# Altium PCB arca.PcbDoc (part 1 of 2)
Units mm, origin at the board's own origin, x right, y up, seen from the top; angles counter-clockwise.
Board outline 304.8 x 85 mm, 2 copper layers (Top Layer, Bottom Layer); 193 components, 131 nets, 585 pads, 90 vias.
Unrouted connection lines stored in the file: 15.
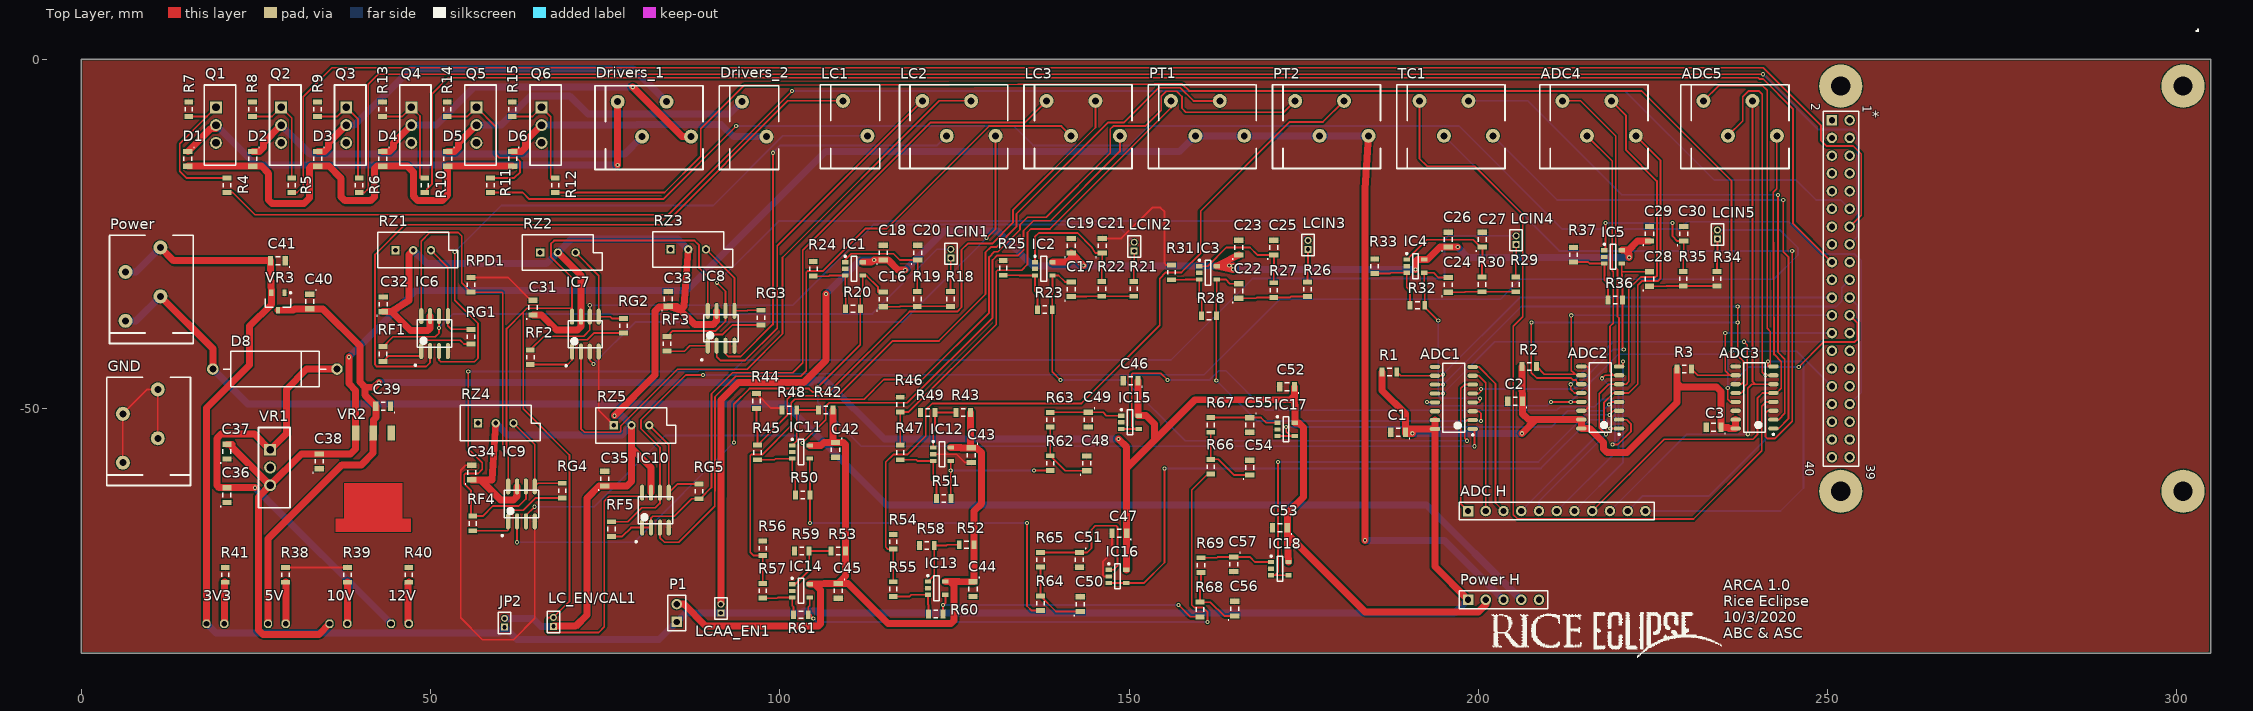
[diagram p0: Top Layer view]
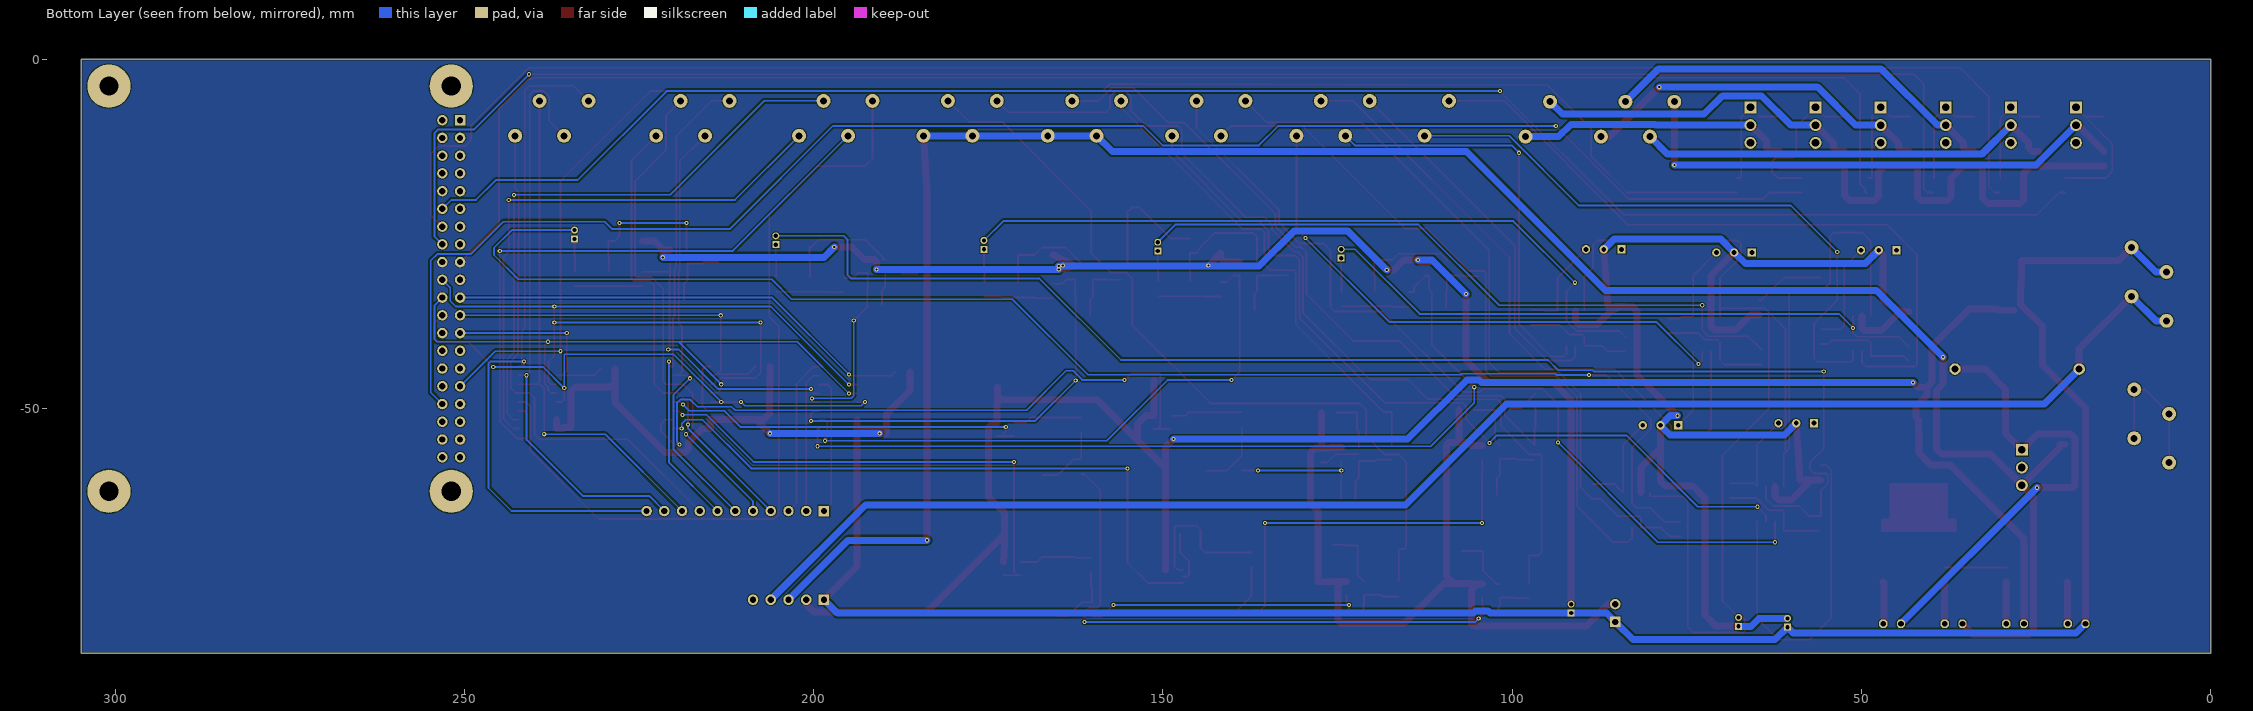
[diagram p1: Bottom Layer view, seen from below]

## Layer stack, top to bottom
Top Solder: solder mask 0.0102, Solder Resist, Dk 3.5
Top Layer: signal copper 0.0356
Dielectric 1: dielectric 0.32, FR-4, Dk 4.8
Bottom Layer: signal copper 0.0356
Bottom Solder: solder mask 0.0102, Solder Resist, Dk 3.5

## Board outline
0,-85 304.8,-85 304.8,0 0,0

## Design rules (kind name [scope] priority, off if disabled: settings)
BoardOutlineClearance [All] p1: gap=0.2 ignorepadtopadclearanceinfootprint=FALSE
Clearance [All] p1: gap=0.127 ignorepadtopadclearanceinfootprint=TRUE except(0.25: Arc-Hole Track-Hole SMDPad-Hole THPad-Hole Via-Hole Fill-Hole Poly-Hole Region-Hole Text-Hole; 0.254: Arc-Arc Arc-Track Arc-SMDPad Arc-THPad Arc-Via Arc-Fill Arc-Poly Arc-Region Arc-Text Track-Track Track-SMDPad Track-THPad Track-Via Track-Fill Track-Poly Track-Region Track-Text)
ComponentClearance [All] p1: gap=0.127 collisioncheckmode=3 verticalgap=0.127 showdistances=TRUE
DiffPairsRouting [All] p1: maxlimit=0.254 minlimit=0.127 mostfreqgap=0.127 toplayer_minwidth=0.127 toplayer_maxwidth=25.4 toplayer_prefwidth=0.127 bottomlayer_minwidth=0.127 bottomlayer_maxwidth=25.4 bottomlayer_prefwidth=0.127 maxuncoupledlength=12.7
Height [All] p1: minheight=0 maxheight=1816.048 prefheight=12.7
HoleSize [All] p1: absolutevalues=TRUE maxlimit=6.3 minlimit=0.3 maxpercent=80.000 minpercent=20.000
HoleToHoleClearance [All] p1: gap=0.25 allowstackedmicrovias=FALSE
MinimumAnnularRing [All] p1: minimumring=0.076
MinimumSolderMaskSliver [All] p1: minsoldermaskwidth=0
PlaneClearance [All] p1: clearance=0.127
PlaneConnect PlaneConnectPowerPads [InPadClass('PowerPads')] p1: planeconnectstyle=Direct reliefexpansion=0.508 reliefentries=4 reliefconductorwidth=0.254 reliefairgap=0.254
PlaneConnect [All] p2: pad.planeconnectstyle=Relief pad.reliefexpansion=0.3 pad.reliefentries=4 pad.reliefconductorwidth=0.127 pad.reliefairgap=0.127 via.planeconnectstyle=Direct via.reliefexpansion=0.3 via.reliefentries=4 via.reliefconductorwidth=0.127 via.reliefairgap=0.127
PolygonConnect PolygonConnectPowerPads [All vs (InPadClass('PowerPads'))] p1: connectstyle=Direct reliefconductorwidth=0.254 reliefentries=4 polygonreliefangle="90 Angle" airgapwidth=0.254
PolygonConnect [All] p2: thpad.connectstyle=Relief thpad.reliefconductorwidth=0.127 thpad.reliefentries=4 thpad.polygonreliefangle="90 Angle" thpad.airgapwidth=0.127 smdpad.connectstyle=Relief smdpad.reliefconductorwidth=0.127 smdpad.reliefentries=4 smdpad.polygonreliefangle="90 Angle" smdpad.airgapwidth=0.127 via.connectstyle=Direct via.reliefconductorwidth=0.127 via.reliefentries=4 via.polygonreliefangle="90 Angle" via.airgapwidth=0.127
RoutingVias [All] p1: holewidth=0.3 width=0.6 viastyle="Through Hole" minholewidth=0.3 minwidth=0.6 maxholewidth=0.6 maxwidth=6.6
SilkToSilkClearance [All] p1: silktosilkclearance=0
SilkToSolderMaskClearance [IsPad] p1: minsilkscreentomaskgap=0.127 clearancetoexposedcopper=TRUE
SolderMaskExpansion [All] p1: expansion=0.075 istentingtop=FALSE
Width Width_1 [InNetClass('PWR') OR InNetClass('GND')] p1: maxlimit=1.5 minlimit=0.5 preferedwidth=1 minimp=50.000000 maximp=50.000000 favimp=50.000000
Width [InNetClass('PWR')] p2: maxlimit=25.4 minlimit=0.127 preferedwidth=0.254 minimp=50.000000 maximp=50.000000 favimp=50.000000
20 further rules are at their usual default settings.

## Classes and differential pairs
net class PWR: +3V3 +3V3_LC +3V3_LCAA +3V3_PT +5V +10V +12 +12V DRIVER_1_NEGATIVE DRIVER_2_NEGATIVE DRIVER_3_NEGATIVE DRIVER_4_NEGATIVE DRIVER_5_NEGATIVE DRIVER_6_NEGATIVE Net3V3_K Net5V_K Net10V_K Net12V_A Net12V_K
component class PT_to_ADCs: C46 C47 C48 C49 C50 C51 C52 C53 C54 C55 C56 C57 IC15 IC16 IC17 IC18 R62 R63 R64 R65 R66 R67 R68 R69
component class Pressure_Transducers_SCH: C42 C43 C44 C45 IC11 IC12 IC13 IC14 P1 R42 R43 R44 R45 R46 R47 R48 R49 R50 R51 R52 R53 R54 R55 R56 R57 R58 R59 R60 R61
component class Power: 3V3 5V 10V 12V C36 C37 C38 C39 C40 C41 D8 PWR_IN1 R38 R39 R40 R41 VR1 VR3
component class PI_SCH: *
component class Load_Cells_SCH: C31 C32 C33 C34 C35 IC6 IC7 IC8 IC9 IC10 JP2 LC_EN/CAL1 RF1 RF2 RF3 RF4 RF5 RG1 RG2 RG3 RG4 RG5 RPD1 RZ1 RZ2 RZ3 RZ4 RZ5 RZ6
component class LC_to_ADC: C16 C17 C18 C19 C20 C21 C22 C23 C24 C25 C26 C27 C28 C29 C30 IC1 IC2 IC3 IC4 IC5 LCAA_EN1 LCIN1 LCIN2 LCIN3 LCIN4 LCIN5 R18 R19 R20 R21 R22 R23 R24 R25 R26 R27 R28 R29 R30 R31 R32 R33 R34 R35 R36 R37
component class drivers_SCH: D1 D2 D3 D4 D5 D6 Q1 Q2 Q3 Q4 Q5 Q6 R4 R5 R6 R7 R8 R9 R10 R11 R12 R13 R14 R15
component class Connectors: ADC4 ADC5 "ADC H" Drivers_1 Drivers_2 GND LC1 LC2 LC3 Power "Power H" PT1 PT2 TC1
component class ADC_SCH: ADC1 ADC2 ADC3 C1 C2 C3 R1 R2 R3

## Components (designator, comment, footprint, x,y, rotation, side; value= is the part's Value field where it differs from the comment)
3V3 "LED5MM" LED5MM 19.177,-80.772 r0 top
5V "LED5MM" LED5MM 27.982,-80.772 r0 top
10V "LED5MM" LED5MM 36.788,-80.772 r0 top
12V "LED5MM" LED5MM 45.593,-80.772 r0 top
* "raspberry_pi" HDR2X20 250.596,-8.687 r270 top
ADC1 "MCP3208" SOIC127P600X175-16N 196.469,-48.45 r180 top
ADC2 "MCP3208" SOIC127P600X175-16N 217.424,-48.387 r180 top
ADC3 "MCP3208" SOIC127P600X175-16N 239.522,-48.387 r180 top
ADC4 "PTSA 1,5/ 4-3,5-Z - 1985218" 4PinCanConnector 212.019,-5.922 r90 top
ADC5 "PTSA 1,5/ 4-3,5-Z - 1985218" 4PinCanConnector 232.212,-5.922 r90 top
"ADC H" "Header 11" HDR1X11 198.501,-64.643 r0 top
C1 "Cap" CAPCP2012X06N 188.493,-53.391 r180 top value=1uF
C2 "Cap" CAPCP2012X06N 205.249,-48.946 r180 top value=1uF
C3 "Cap" CAPCP2012X06N 233.655,-52.68 r180 top value=1uF
C16 "1nF" CAPCP2012X06N 114.774,-34.34 r90 top
C17 "1nF" CAPCP2012X06N 141.698,-32.893 r90 top
C18 "0.1UF" CAPCP2012X06N 114.774,-27.652 r90 top
C19 "0.1UF" CAPCP2012X06N 141.698,-26.67 r90 top
C20 "1nF" CAPCP2012X06N 119.727,-27.652 r90 top
C21 "1nF" CAPCP2012X06N 146.143,-26.67 r90 top
C22 "1nF" CAPCP2012X06N 165.701,-33.147 r90 top
C23 "0.1UF" CAPCP2012X06N 165.701,-26.924 r90 top
C24 "1nF" CAPCP2012X06N 195.673,-32.258 r90 top
C25 "1nF" CAPCP2012X06N 170.716,-26.924 r90 top
C26 "0.1UF" CAPCP2012X06N 195.673,-25.781 r90 top
C27 "1nF" CAPCP2012X06N 200.561,-25.781 r90 top
C28 "1nF" CAPCP2012X06N 224.482,-31.43 r90 top
C29 "0.1UF" CAPCP2012X06N 224.482,-24.953 r90 top
C30 "1nF" CAPCP2012X06N 229.37,-24.953 r90 top
C31 "1UF" CAPCP2012X06N 64.643,-35.513 r90 top
C32 "1UF" CAPCP2012X06N 43.18,-35.052 r90 top
C33 "1UF" CAPCP2012X06N 83.978,-34.278 r90 top
C34 "1UF" CAPCP2012X06N 55.849,-59.127 r90 top
C35 "1UF" CAPCP2012X06N 74.93,-60.016 r90 top
C36 "Cap" CAPCP2012X06N 20.828,-62.357 r90 top value=.33uF
C37 "Cap" CAPCP2012X06N 20.828,-56.134 r90 top value=.1uF
C38 "Cap" CAPCP2012X06N 34.036,-57.531 r90 top value=10uF
C39 "Cap" CAPCP2012X06N 43.18,-49.657 r180 top value=10uF
C40 "Cap" CAPCP2012X06N 32.7,-34.651 r270 top value=1uF
C41 "Cap" CAPCP2012X06N 28.128,-28.809 r180 top value=2.2uF
C42 "0.1UF" CAPCP2012X06N 107.95,-55.88 r270 top
C43 "0.1UF" CAPCP2012X06N 127.381,-56.642 r270 top
C44 "0.1UF" CAPCP2012X06N 127.635,-75.819 r270 top
C45 "0.1UF" CAPCP2012X06N 108.331,-76.073 r270 top
C46 "0.1UF" CAPCP2012X06N 150.207,-45.974 r180 top
C47 "0.1UF" CAPCP2012X06N 148.59,-67.818 r180 top
C48 "68nF" CAPCP2012X06N 143.891,-57.819 r90 top
C49 "680pF" CAPCP2012X06N 144.145,-51.562 r270 top
C50 "68nF" CAPCP2012X06N 143.002,-77.978 r90 top
C51 "680pF" CAPCP2012X06N 142.875,-71.628 r270 top
C52 "0.1UF" CAPCP2012X06N 172.593,-46.863 r180 top
C53 "0.1UF" CAPCP2012X06N 171.577,-67.056 r180 top
C54 "68nF" CAPCP2012X06N 167.259,-58.42 r90 top
C55 "680pF" CAPCP2012X06N 167.259,-52.324 r270 top
C56 "68nF" CAPCP2012X06N 165.1,-78.613 r90 top
C57 "680pF" CAPCP2012X06N 164.973,-72.263 r270 top
D1 "Diode" DIOC2012X06N 15.24,-14.224 r270 top
D2 "Diode" DIOC2012X06N 24.536,-14.224 r270 top
D3 "Diode" DIOC2012X06N 33.833,-14.224 r270 top
D4 "Diode" DIOC2012X06N 43.129,-14.224 r270 top
D5 "Diode" DIOC2012X06N 52.426,-14.224 r270 top
D6 "Diode" DIOC2012X06N 61.722,-14.224 r270 top
D8 "Diode" DIODE-0.7 27.686,-44.323 r0 top
Drivers_1 "1991118" 4PinCanConnector 76.764,-6.049 r90 top
Drivers_2 "0" 2POS_GREEN_BOI 91.334,-3.763 r90 top
GND "1991118" 4PinCanConnector 5.922,-57.729 r180 top
IC1 "LMV321LICTRT" SOT95P245X110-5N 110.583,-29.972 r0 top
IC2 "LMV321LICTRT" SOT95P245X110-5N 137.761,-29.972 r0 top
IC3 "LMV321LICTRT" SOT95P245X110-5N 161.276,-30.541 r0 top
IC4 "LMV321LICTRT" SOT95P245X110-5N 190.974,-29.591 r0 top
IC5 "LMV321LICTRT" SOT95P245X110-5N 219.275,-28.255 r0 top
IC6 "MCP6N11R" SOIC127P1030X265-8N 50.546,-39.243 r90 top
IC7 "MCP6N11R" SOIC127P1030X265-8N 72.136,-39.323 r90 top
IC8 "MCP6N11R" SOIC127P1030X265-8N 91.567,-38.481 r90 top
IC9 "MCP6N11R" SOIC127P1030X265-8N 62.992,-63.627 r90 top
IC10 "MCP6N11R" SOIC127P1030X265-8N 82.169,-64.516 r90 top
IC11 "LMV321LICTRT" SOT95P245X110-5N 103.017,-56.195 r0 top
IC12 "LMV321LICTRT" SOT95P245X110-5N 123.19,-56.515 r0 top
IC13 "LMV321LICTRT" SOT95P245X110-5N 122.428,-75.692 r0 top
IC14 "LMV321LICTRT" SOT95P245X110-5N 102.997,-76.073 r0 top
IC15 "LMV321LICTRT" SOT95P245X110-5N 150.114,-51.943 r0 top
IC16 "LMV321LICTRT" SOT95P245X110-5N 148.336,-74.007 r0 top
IC17 "LMV321LICTRT" SOT95P245X110-5N 172.466,-52.959 r0 top
IC18 "LMV321LICTRT" SOT95P245X110-5N 171.557,-72.898 r0 top
JP2 "PINHD-1X2" MHDR1X2 60.579,-81.28 r90 top
LC1 "0" 2POS_GREEN_BOI 105.796,-3.636 r90 top
LC2 "1991118" 4PinCanConnector 120.373,-5.922 r90 top
LC3 "1991118" 4PinCanConnector 138.169,-5.922 r90 top
LC_EN/CAL1 "PINHD-1X2" MHDR1X2 67.564,-81.153 r90 top
LCAA_EN1 "PINHD-1X2" MHDR1X2 91.533,-79.248 r90 top
LCIN1 "PINHD-1X2" MHDR1X2 124.46,-28.448 r90 top
LCIN2 "PINHD-1X2" MHDR1X2 150.715,-27.432 r90 top
LCIN3 "PINHD-1X2" MHDR1X2 175.607,-27.178 r90 top
LCIN4 "PINHD-1X2" MHDR1X2 205.4,-26.518 r90 top
LCIN5 "PINHD-1X2" MHDR1X2 234.209,-25.69 r90 top
P1 "Header 2" HDR1X2 85.217,-80.518 r90 top
Power "1991118" 4PinCanConnector 6.303,-37.409 r180 top
"Power H" "Header 5" HDR1X5 198.501,-77.343 r0 top
PT1 "1991118" 4PinCanConnector 155.965,-5.922 r90 top
PT2 "1991118" 4PinCanConnector 173.761,-5.922 r90 top
Q1 "FQP30N06L-ND" UA78M 22.098,-9.525 r90 top
Q2 "FQP30N06L-ND" UA78M 31.42,-9.525 r90 top
Q3 "FQP30N06L-ND" UA78M 40.742,-9.525 r90 top
Q4 "FQP30N06L-ND" UA78M 50.063,-9.525 r90 top
Q5 "FQP30N06L-ND" UA78M 59.385,-9.525 r90 top
Q6 "FQP30N06L-ND" UA78M 68.707,-9.525 r90 top
R1 "Res1" RESC_0805_2012 187.249,-44.729 r180 top
R2 "Res1" RESC_0805_2012 207.264,-43.942 r180 top
R3 "Res1" RESC_0805_2012 229.464,-44.323 r180 top
R4 "Res1" RESC_0805_2012 20.828,-18 r90 top value=10K
R5 "Res1" RESC_0805_2012 30.099,-18 r90 top value=10K
R6 "Res1" RESC_0805_2012 39.751,-18 r90 top value=10K
R7 "Res1" RESC_0805_2012 15.367,-7.112 r270 top value=270K
R8 "Res1" RESC_0805_2012 24.486,-7.112 r270 top value=270K
R9 "Res1" RESC_0805_2012 33.783,-7.112 r270 top value=270K
R10 "Res1" RESC_0805_2012 49.149,-18 r90 top value=10K
R11 "Res1" RESC_0805_2012 58.547,-18 r90 top value=10K
R12 "Res1" RESC_0805_2012 67.818,-18 r90 top value=10K
R13 "Res1" RESC_0805_2012 43.079,-7.112 r270 top value=270K
R14 "Res1" RESC_0805_2012 52.376,-7.112 r270 top value=270K
R15 "Res1" RESC_0805_2012 61.672,-7.112 r270 top value=270K
R18 "24.7K" RESC_0805_2012 124.426,-34.29 r90 top
R19 "164K" RESC_0805_2012 119.665,-34.29 r270 top
R20 "50.6K" RESC_0805_2012 110.456,-35.687 r180 top
R21 "24.7K" RESC_0805_2012 150.64,-32.843 r90 top
R22 "164K" RESC_0805_2012 146.081,-32.843 r270 top
R23 "50.6K" RESC_0805_2012 137.922,-35.814 r180 top
R24 "12.6K" RESC_0805_2012 104.775,-29.972 r90 top
R25 "12.6K" RESC_0805_2012 131.953,-29.845 r90 top
R26 "24.7K" RESC_0805_2012 175.514,-32.893 r90 top
R27 "164K" RESC_0805_2012 170.688,-33.02 r270 top
R28 "50.6K" RESC_0805_2012 161.417,-36.703 r180 top
R29 "24.7K" RESC_0805_2012 205.325,-32.208 r90 top
R30 "164K" RESC_0805_2012 200.499,-32.208 r270 top
R31 "12.6K" RESC_0805_2012 156.049,-30.48 r90 top
R32 "50.6K" RESC_0805_2012 191.262,-35.179 r180 top
R33 "12.6K" RESC_0805_2012 185.132,-29.591 r90 top
R34 "24.7K" RESC_0805_2012 234.134,-31.38 r90 top
R35 "164K" RESC_0805_2012 229.308,-31.38 r270 top
R36 "50.6K" RESC_0805_2012 219.583,-34.417 r180 top
R37 "12.6K" RESC_0805_2012 213.614,-27.94 r90 top
R38 "140" RESC_0805_2012 29.21,-73.787 r90 top
R39 "470" RESC_0805_2012 38.1,-73.787 r270 top
R40 "530" RESC_0805_2012 46.863,-73.787 r270 top
R41 "39" RESC_0805_2012 20.574,-73.787 r90 top
R42 "20K" RESC_0805_2012 106.553,-50.165 r180 top
R43 "20K" RESC_0805_2012 126.238,-50.546 r180 top
R44 "22" RESC_0805_2012 96.647,-48.895 r270 top
R45 "20K" RESC_0805_2012 96.774,-56.261 r90 top
R46 "22" RESC_0805_2012 117.221,-49.403 r270 top
R47 "20K" RESC_0805_2012 117.221,-56.261 r90 top
R48 "3K" RESC_0805_2012 101.346,-50.165 r180 top
R49 "3K" RESC_0805_2012 121.158,-50.546 r180 top
R50 "150K" RESC_0805_2012 103.251,-62.357 r180 top
R51 "150K" RESC_0805_2012 123.444,-62.865 r180 top
R52 "20K" RESC_0805_2012 126.712,-69.469 r180 top
R53 "20K" RESC_0805_2012 108.331,-70.358 r180 top
R54 "22" RESC_0805_2012 116.205,-69.054 r270 top
R55 "20K" RESC_0805_2012 116.205,-75.819 r90 top
R56 "22" RESC_0805_2012 97.536,-69.977 r270 top
R57 "20K" RESC_0805_2012 97.536,-76.073 r90 top
R58 "3K" RESC_0805_2012 121.031,-69.596 r180 top
R59 "3K" RESC_0805_2012 103.124,-70.358 r180 top
R60 "150K" RESC_0805_2012 122.301,-79.375 r180 top
R61 "150K" RESC_0805_2012 102.997,-79.502 r180 top
R62 "1.5K" RESC_0805_2012 138.684,-57.785 r270 top
R63 "150K" RESC_0805_2012 138.684,-51.562 r270 top
R64 "1.5K" RESC_0805_2012 137.287,-77.851 r270 top
R65 "150K" RESC_0805_2012 137.287,-71.628 r270 top
R66 "1.5K" RESC_0805_2012 161.671,-58.293 r270 top
R67 "150K" RESC_0805_2012 161.671,-52.324 r270 top
R68 "1.5K" RESC_0805_2012 160.147,-78.74 r270 top
R69 "150K" RESC_0805_2012 160.274,-72.39 r270 top
RF1 "20K" RESC_0805_2012 43.18,-42.164 r270 top
RF2 "20K" RESC_0805_2012 64.262,-42.625 r270 top
RF3 "20K" RESC_0805_2012 83.82,-40.706 r270 top
RF4 "20K" RESC_0805_2012 56.007,-66.421 r270 top
RF5 "20K" RESC_0805_2012 75.877,-67.23 r270 top
RG1 "200" RESC_0805_2012 55.753,-39.685 r270 top
RG2 "200" RESC_0805_2012 77.597,-38.119 r270 top
RG3 "200" RESC_0805_2012 97.282,-36.957 r270 top
RG4 "200" RESC_0805_2012 68.834,-61.722 r270 top
RG5 "200" RESC_0805_2012 88.392,-61.835 r270 top
RPD1 "20K" RESC_0805_2012 55.753,-32.258 r90 top
RZ1 "RPot" VR5 47.498,-27.305 r0 top value=1K
RZ2 "RPot" VR5 68.199,-27.639 r0 top value=1K
RZ3 "RPot" VR5 86.868,-27.178 r0 top value=1K
RZ4 "RPot" VR5 59.309,-52.07 r0 top value=1K
RZ5 "RPot" VR5 78.74,-52.371 r0 top value=1K
TC1 "1991118" 4PinCanConnector 191.557,-5.922 r90 top
VR1 "UA78M" UA78M 29.845,-58.547 r90 top
VR2 "LM1084ISX-5.0/NOPB" LM1084ISX-5.0/NOPB 41.783,-53.467 r90 top
VR3 "AP2210N-3.3TRG1" SOT95P245X110-3N 28.128,-34.651 r270 top

## Footprints (in the part's own frame and the unit in brackets; to place one, negate y for a bottom-side part, rotate by r counter-clockwise, add the part's x,y. Pads: shape width x height; smd on the part's side, far side on the other; paste and mask are expansions set on the pad)
2POS_GREEN_BOI [mm]
  round 2 hole 1: 1(-2.286,-3.226) 2(-7.286,-6.726)
  silkscreen extent -11.99,-8.5 0.01,0.02
4PinCanConnector [mm]
  round 2 hole 1: 1(0,0) 2(-5,-3.5) 3(0,-7) 4(-5,-10.5)
  silkscreen extent -9.7,-12.23 2.3,3.25, body extent -9.65,-12.32 2.35,3.18, height 13.6
CAPCP2012X06N [mm] "Chip Capacitor, 2-Leads, Body 2.00x1.20mm, IPC Medium Density"
  rect 0.75x1.35 smd: 1(-1.05,0) 2(1.05,0)
  silkscreen extent -1.69,-0.58 0.3,0.94, body extent -1,-0.6 1,0.6, height 0.6
DIOC2012X06N [mm] "Chip Diode, 2-Leads, Body 2.00x1.20mm, IPC Medium Density"
  rect 0.75x1.35 smd: 1(-1.05,0) 2(1.05,0)
  silkscreen extent -1.69,-0.58 0.3,0.94, body extent -1,-0.6 1,0.6, height 0.6
DIODE-0.7 [mm] "Diode, Thru-Hole; 2 Leads; 0.7 in Pin Spacing"
  round 1.65 hole 1: 1(-8.89,0) 2(8.89,0)
  silkscreen extent -7.37,-2.54 7.37,2.54
HDR1X2 [mm] "Connector; Header; 2 Position"
  rect 1.5x1.5 hole 0.9: 1(0,0)
  round 1.5 hole 0.9: 2(2.54,0)
  silkscreen extent -1.27,-1.27 3.81,1.27
HDR1X5 [mm] "Connector; Header; 5 Position"
  rect 1.5x1.5 hole 0.9: 1(0,0)
  round 1.5 hole 0.9: 2(2.54,0) 3(5.08,0) 4(7.62,0) 5(10.16,0)
  silkscreen extent -1.27,-1.27 11.43,1.27
HDR1X11 [mm] "Connector; Header; 11 Position"
  rect 1.5x1.5 hole 0.9: 1(0,0)
  round 1.5 hole 0.9: 2(2.54,0) 3(5.08,0) 4(7.62,0) 5(10.16,0) 6(12.7,0) 7(15.24,0) 8(17.78,0) 9(20.32,0) 10(22.86,0) 11(25.4,0)
  silkscreen extent -1.27,-1.27 26.67,1.27
HDR2X20 [mm] "Connector; Header; 20x2 Position"
  round 1.5 hole 0.9: 1(0,2.54) 3(2.54,2.54) 4(2.54,0) 5(5.08,2.54) 6(5.08,0) 7(7.62,2.54) 8(7.62,0) 9(10.16,2.54) 10(10.16,0) 11(12.7,2.54) 12(12.7,0) 13(15.24,2.54) 14(15.24,0) 15(17.78,2.54) 16(17.78,0) 17(20.32,2.54) 18(20.32,0) 19(22.86,2.54) 20(22.86,0) 21(25.4,2.54) 22(25.4,0) 23(27.94,2.54) 24(27.94,0) 25(30.48,2.54) 26(30.48,0) 27(33.02,2.54) 28(33.02,0) 29(35.56,2.54) 30(35.56,0) 31(38.1,2.54) 32(38.1,0) 33(40.64,2.54) 34(40.64,0) 35(43.18,2.54) 36(43.18,0) 37(45.72,2.54) 38(45.72,0) 39(48.26,2.54) 40(48.26,0)
  rect 1.5x1.5 hole 0.9: 2(0,0)
  silkscreen extent -1.27,-1.27 49.53,3.81
LED5MM [mil]
  oct 46.48x46.48 / inner oct 60x60 / far side oct 46.48x46.48 hole 32: A(-50,0) K(50,0)
LM1084ISX-5.0/NOPB [mil]
  rect 85x42 smd: 1(0,-100) 2(0,0) 3(0,100)
  Top Layer region: -558,-164 -283,-164 -283,164 -558,164
  Top Layer region: -558,-212.5 -483,-212.5 -483,212.5 -558,212.5
MHDR1X2 [mm] "Connector; Header; 2 Position"
  rect 1x1 hole 0.6: 1(0,0)
  round 1 hole 0.6: 2(1.27,0)
  silkscreen extent -0.9,-0.9 2.17,0.9
RESC_0805_2012 [mm] "Chip Resistor, 2-Leads, Body 2.00x1.20mm, IPC Medium Density"
  rect 0.7x1.25 smd: 1(-1.05,0) 2(1.05,0)
  silkscreen extent -0.3,-0.53 0.3,0.53, body extent -1,-0.6 1,0.6, height 0.6
SOIC127P600X175-16N [mm] "SOIC, 16-Leads, Body 9.90x3.90mm, Pitch 1.27mm, IPC Medium Density"
  oval 1.5x0.6 smd: 1(-2.7,4.445) 2(-2.7,3.175) 3(-2.7,1.905) 4(-2.7,0.635) 5(-2.7,-0.635) 6(-2.7,-1.905) 7(-2.7,-3.175) 8(-2.7,-4.445) 9(2.7,-4.445) 10(2.7,-3.175) 11(2.7,-1.905) 12(2.7,-0.635) 13(2.7,0.635) 14(2.7,1.905) 15(2.7,3.175) 16(2.7,4.445)
  silkscreen extent -2.83,-4.95 1.55,5.42, body extent -1.95,-4.95 1.95,4.95, height 1.75
SOIC127P1030X265-8N [mm] "SOIC, 8-Leads, Body 4.90x3.90mm, Pitch 1.27mm, IPC Medium Density"
  oval 2.3x0.6 smd: 1(-2.5,1.905) 2(-2.5,0.635) 3(-2.5,-0.635) 4(-2.5,-1.905) 5(2.5,-1.905) 6(2.5,-0.635) 7(2.5,0.635) 8(2.5,1.905)
  silkscreen extent -4.65,-2.45 1.95,2.88, body extent -1.95,-2.45 1.95,2.45, height 2.65
SOT95P245X110-3N [mm] "SOT23, 3-Leads, Body 3.60x2.45mm, Pitch 0.95mm, IPC Medium Density"
  rect 0.9x0.6 smd: 1(-1.25,0.95) 2(-1.25,-0.95) 3(1.25,0)
  silkscreen extent -1.37,-1.8 0.8,1.93, body extent -0.8,-1.8 0.8,1.8, height 1.1
SOT95P245X110-5N [mm] "SOT23, 5-Leads, Body 3.60x2.45mm, Pitch 0.95mm, IPC Medium Density"
  rect 0.9x0.6 smd: 1(-1.25,0.95) 2(-1.25,0) 3(-1.25,-0.95) 4(1.25,-0.95) 5(1.25,0.95)
  silkscreen extent -1.37,-1.8 0.4,1.92, body extent -0.8,-1.8 0.8,1.8, height 1.1
UA78M [mm] "TO220"
  rect 1.7x1.7 hole 1.1: 1(2.667,2.84)
  round 1.7 hole 1.1: 2(0.127,2.84) 3(-2.413,2.84)
  silkscreen extent -5.62,0.01 5.88,4.51
VR5 [mm] "Thru-Hole; 3 Leads"
  rect 1.2x1.2 hole 0.7: 1(-2.54,0)
  round 1.2 hole 0.7: 2(0,0) 3(2.54,0)
  silkscreen extent -5.08,-2.54 6.35,2.54

## Part data
3V3 5V 10V 12V: "LEDOSRAM:- CHIPLEDLG R971, LG N971, LY N971, LG Q971, LY Q971, LO R971, LY R971 LH N974, LH R974LS Q976, LO Q976, LY Q976LO Q996- Hyper CHIPLEDLW Q18SLB Q993, LB Q99A, LB R99A- SideLEDLS A670, LO A670, LY A670, LG A670, LP A670LB A673, LV A673, LT A673, LW A673LH A674LY A675LS A676, LA A676, LO A676, LY A676, LW A676LS A679, LY A679, LG A679-  Hyper Micro SIDELEDÂ®LS Y876, LA Y876, LO Y876, LY Y876LT Y87S- SmartLEDLW L88C, LW L88SLB L89C, LB L89S, LG L890LS L89K, LO L89K, LY L89KLS L896, LA L896, LO L896, LY L896- TOPLEDLS T670, LO T670, LY T670, LG T670, LP T670LSG T670, LSP T670, LSY T670, LOP T670, LYG T670LG T671, LOG T671, LSG T671LB T673, LV T673, LT T673, LW T673LH T674LS T676, LA T676, LO T676, LY T676, LB T676, LH T676, LSB T676, LW T676LB T67C, LV T67C, LT T67C, LS T67K, LO T67K, LY T67K, LW E67CLS E67B, LA E67B, LO E67B, LY E67B, LB E67C, LV E67C, LT E67CLW T67CLS T679, LY T679, LG T679LS T770, LO T770, LY T770, LG T770, LP T770LB T773, LV T773, LT T773, LW T773LH T774LS E675, LA E675, LY E675, LS T675LS T776, LA T776, LO T776, LY T776, LB T776LHGB T686LT T68C, LB T68C- Hyper Mini TOPLEDÂ®LB M676- Mini TOPLED SantanaÂ®LG M470LS M47K, LO M47K, LY M47K Source: http://www.osram.convergy.deLUXEON:- LUMILEDÂ®LXK2-PW12-R00, LXK2-PW12-S00, LXK2-PW14-U00, LXK2-PW14-V00LXK2-PM12-R00, LXK2-PM12-S00, LXK2-PM14-U00LXK2-PE12-Q00, LXK2-PE12-R00, LXK2-PE12-S00, LXK2-PE14-T00, LXK2-PE14-U00LXK2-PB12-K00, LXK2-PB12-L00, LXK2-PB12-M00, LXK2-PB14-N00, LXK2-PB14-P00, LXK2-PB14-Q00LXK2-PR12-L00, LXK2-PR12-M00, LXK2-PR14-Q00, LXK2-PR14-R00LXK2-PD12-Q00, LXK2-PD12-R00, LXK2-PD12-S00LXK2-PH12-R00, LXK2-PH12-S00LXK2-PL12-P00, LXK2-PL12-Q00, LXK2-PL12-R00 Source: www.luxeon.comKINGBRIGHT:KA-3528ASYCSource: www.kingbright.com", DeviceName=5MM, DeviceSetName=LED, GateName_1=G$1, LibraryName=led, SymbolName_1=LED
ADC4 ADC5: "Phoenix Contact PCB Terminal Spring Cage Clamp + Button 4 pos"
"ADC H": "Header, 11-Pin", LatestRevisionDate=17-Jul-2002, LatestRevisionNote="Re-released for DXP Platform.", Publisher="Altium Limited"
C1 C2 C3 C36 C37 C38 C39 C40 C41: "Capacitor", LatestRevisionDate=17-Jul-2002, LatestRevisionNote="Re-released for DXP Platform.", PackageDescription="Radial Cap, Thru-Hole; 2 Leads; 0.3 in Pin Spacing", PackageReference=RAD-0.3, Published=8-Jun-2000, Publisher="Altium Limited"
C16 C17 C18 C19 C20 C21 C22 C23 C24 C25 C26 C27 C28 C29 C30 C31 C32 C33 C34 C35 C42 C43 C44 C45 C46 C47 C48 C49 C50 C51 C52 C53 C54 C55 C56 C57: library part C-USC0805, "CAPACITOR, American symbol", DeviceName=C0805, DeviceSetName=C-US, GateName_1=G$1, LibraryName=rcl, SPICEPREFIX=C, SymbolName_1=C-US
D1 D2 D3 D4 D5 D6 D8: "Default Diode", Code_JEDEC=DO-214-AB, LatestRevisionDate=17-Jul-2002, LatestRevisionNote="Re-released for DXP Platform.", PackageDescription="DO-214-AB/SMC; 2 C-Bend Leads; Body 7.9 x 5.9 mm, inc. leads (LxW)", PackageReference=SMC, PackageVersion=Sep-1996, Published=8-Jun-2000, Publisher="Altium Limited"
Drivers_2 LC1: library part 1991095, "Phoenix Contact Connector PCB Terminal 2 port"
IC1 IC2 IC3 IC4 IC5 IC11 IC12 IC13 IC14 IC15 IC16 IC17 IC18: "High Performance, 145 MHz FastFET Op AmpsSource: http://www.analog.com/static/imported-files/data_sheets/AD8065_8066.pdf", MPN=AD8065ARTZ-REEL7, +=+, +VS=+VS, -=-, -VS=-VS, DeviceName=RT, DeviceSetName=LMV321LICT, GateName_1=G$, LibraryName=st-microelectronics-extra, MF="ALTERA CORPORATION", OC_FARNELL=1464845, OC_NEWARK=59K6316, SymbolName_1=OP+-VS
IC6 IC7 IC8 IC9 IC10: "Low Cost, Low Power, Instrumentation AmplifierSource: http://www.analog.com/UploadedFiles/Data_Sheets/37793330023930AD620_e.pdf", MPN=AD620AR, +V=+V, -V=-V, DeviceName=R, DeviceSetName=MCP6N11, GateName_1=G$1, LibraryName=microchip-extra, OC_FARNELL=1464424, OC_NEWARK=05F7109, SymbolName_1=MCP6N11
JP2 LC_EN/CAL1 LCAA_EN1 LCIN1 LCIN2 LCIN3 LCIN4 LCIN5: "PIN HEADER", DeviceSetName=PINHD-1X2, GateName_1=G$1, LibraryName=pinhead, SymbolName_1=PINHD2
P1: "Header, 2-Pin", LatestRevisionDate=17-Jul-2002, LatestRevisionNote="Re-released for DXP Platform.", Publisher="Altium Limited"
"Power H": "Header, 5-Pin", LatestRevisionDate=17-Jul-2002, LatestRevisionNote="Re-released for DXP Platform.", Publisher="Altium Limited"
Q1 Q2 Q3 Q4 Q5 Q6: library part MOSFET-N, "N-Channel MOSFET", LatestRevisionDate=17-Jul-2002, LatestRevisionNote="Re-released for DXP Platform.", PackageDescription="TO, Flat Index; 3 In-Line, Axial Leads; Body Dia. 4.6mm; Lead Dia. 0.5 mm (max)", PackageReference=E3, PackageVersion=1995/1996, Published=8-Jun-2000, Publisher="Altium Limited"
R1 R2 R3 R4 R5 R6 R7 R8 R9 R10 R11 R12 R13 R14 R15: "Resistor", LatestRevisionDate=17-Jul-2002, LatestRevisionNote="Re-released for DXP Platform.", PackageDescription="Axial Device, Thru-Hole; 2 Leads; 0.3 in Pin Spacing", PackageReference=AXIAL-0.3, Published=8-Jun-2000, Publisher="Altium Limited"
R18 R19 R20 R21 R22 R23 R24 R25 R26 R27 R28 R29 R30 R31 R32 R33 R34 R35 R36 R37 R38 R39 R40 R41 R42 R43 R44 R45 R46 R47 R48 R49 R50 R51 R52 R53 R54 R55 R56 R57 R58 R59 R60 R61 R62 R63 R64 R65 R66 R67 R68 R69 RF1 RF2 RF3 RF4 RF5 RG1 RG2 RG3 RG4 RG5 RPD1: library part R-US_R0805, "RESISTOR, American symbol", DeviceName=R0805, DeviceSetName=R-US_, GateName_1=G$1, SymbolName_1=R-US
  R18 R19 R20 R21 R22 R23 R24 R25 R26 R27 R28 R29 R30 R31 R32 R33 R34 R35 R36 R37 R42 R43 R44 R45 R46 R47 R48 R49 R50 R51 R52 R53 R54 R55 R56 R57 R58 R59 R60 R61 R62 R63 R64 R65 R66 R67 R68 R69 RF1 RF2 RF3 RF4 RF5 RG1 RG2 RG3 RG4 RG5 RPD1: LibraryName=rcl
  R38 R39 R40 R41: LibraryName=resistor
RZ1 RZ2 RZ3 RZ4 RZ5: "Potentiometer", LatestRevisionDate=17-Jul-2002, LatestRevisionNote="Re-released for DXP Platform.", PackageDescription="Variable Resistor, Thru-Hole; 3 Leads", PackageReference=VR5, Published=8-Jun-2000, Publisher="Altium Limited", Set Position=0.5, Sim Note="Enter the Resistance value and the set point into parameter fields."
VR1: library part UA78M*, "POSITIVE-VOLTAGE REGULATORS Source: http://focus.ti.com/lit/ds/symlink/ua78m33.pdf", DeviceSetName=UA78M*, GateName_1=G$1, GND=GND, LibraryName=texas-extra, SymbolName_1=78XX2GND
VR2: MANUFACTURER_PART_NUMBER=LM1084ISX5.0NOPB, DeviceSetName=LM1084ISX-5.0/NOPB, GateName_1=A, LibraryName=texas-extra, SymbolName_1=LM1084IS-5.0, VENDOR="Texas Instruments"
VR3: "3.3V regulator300mA rating.", DeviceSetName=AP2210N-3.3TRG1, GateName_1=G$1, LibraryName=diodes-extra, SymbolName_1=AP2210N-3.3TRG1

## Free pads (board coordinates)
  round 6.2 hole 2.75: 3(251.866,-61.817) 3(251.866,-3.817) 3(300.866,-61.817) 3(300.866,-3.817)

## Via types
v1: diameter 0.6, hole 0.3, Top Layer to Bottom Layer, 90 vias

## Nets (pads, with @x,y where several pads share a name; then routed paths per layer and width w, separated by ;. In a path a pad name is that pad's centre, name@x,y a point inside that pad or via, vN(x,y) a via of type N, cw(c..) or ccw(c..) an arc to the next point about the centre after c; other vN are vias at no path point)
+3V3: 3V3.A "Power H.1" ADC1.15 ADC1.16 ADC2.15 ADC2.16 ADC3.15 ADC3.16 C1.1 C2.1 C3.1 C41.2 JP2.1 LCAA_EN1.1 P1.1 Power.3 Power.4 R1.2 R2.2 R3.2 VR3.2 | length 380.9
  Top Layer w1: Power.4@11.303,-26.909 13.203,-28.809 C41.2@27.078,-28.809 27.078,-31.015 VR3.2@27.178,-33.401 27.178,-35.052 24.054,-38.176 24.054,-43.764 17.907,-49.911 3V3.A@17.907,-80.772 ; R1.2@186.199,-44.729 186.199,-47.371 189.543,-50.716 C1.1@189.543,-52.895 ; v1(190.525,-53.518) 189.543,-53.518 C1.1@189.543,-53.391 C1.1@189.543,-52.895 ; ADC1.15@193.769,-51.625 ADC1.16@193.769,-52.895 ADC1.16@193.751,-52.895 ; 198.501,-77.343 193.751,-72.593 ADC1.16@193.751,-52.895 ; R2.2@206.214,-43.942 206.214,-46.372 C2.1@206.299,-48.946 206.299,-50.724 207.137,-51.562 208.204,-51.562 ; v1(206.248,-53.518) 208.204,-51.562 ; R3.2@228.414,-44.323 228.414,-46.296 ; ADC3.15@236.822,-51.562 ADC3.16@236.822,-52.832 235.839,-52.832 235.687,-52.68 C3.1@234.705,-52.68 234.705,-47.507 234.061,-46.863 228.981,-46.863 228.414,-46.296 ; C1.1@189.543,-52.895 ADC1.16@193.751,-52.895 ; 208.204,-51.562 ADC2.15@214.724,-51.562 ADC2.16@214.724,-52.832 215.925,-52.832 217.926,-54.832 217.926,-55.753 218.434,-56.261 221.285,-56.261 228.414,-49.132 228.414,-46.296
  Bottom Layer w1: Power.3@6.303,-30.409 7.803,-30.409 Power.4@11.303,-26.909 ; 3V3.A@17.907,-80.772 19.253,-82.118 59.741,-82.118 JP2.1@60.579,-81.28 62.357,-83.058 82.677,-83.058 P1.1@85.217,-80.518 86.487,-79.248 LCAA_EN1.1@91.533,-79.248 103.127,-79.248 103.404,-78.971 105.235,-78.971 105.512,-79.248 196.596,-79.248 198.501,-77.343 ; v1(190.525,-53.518) v1(206.248,-53.518)
+3V3_LC: C31.1 C32.1 C33.1 C34.1 C35.1 IC6.7 IC7.7 IC8.7 IC9.7 IC10.7 JP2.2 LC_EN/CAL1.1 RZ1.2 RZ2.2 RZ3.2 RZ4.2 RZ5.2 | length 217.6
  Top Layer w1: C32.1@43.18,-36.102 44.374,-36.102 ; RZ1.2@47.498,-27.305 46.888,-27.915 46.888,-34.519 44.374,-36.102 ; IC6.7@49.911,-36.743 49.911,-38.481 49.573,-38.819 47.091,-38.819 44.374,-36.102 ; C34.1@55.849,-60.177 57.154,-60.177 ; RZ4.2@59.309,-52.07 58.801,-60.177 57.154,-60.177 ; IC9.7@62.357,-61.127 62.357,-62.535 61.849,-63.043 60.02,-63.043 57.154,-60.177 ; C31.1@64.643,-36.563 65.837,-36.563 68.009,-38.735 70.993,-38.735 71.501,-38.227 IC7.7@71.501,-36.823 71.501,-30.941 RZ2.2@68.199,-27.639 ; LC_EN/CAL1.1@67.564,-81.153 67.58,-81.137 70.758,-81.137 72.344,-79.551 72.344,-62.81 74.087,-61.066 C35.1@74.755,-61.066 ; C35.1@74.93,-61.066 78.105,-61.066 78.74,-60.431 78.74,-55.615 ; v1(76.302,-51.003) 82.118,-45.187 82.118,-36.039 82.704,-35.453 83.853,-35.453 C33.1@83.978,-35.328 ; RZ5.2@78.74,-52.371 78.74,-55.615 ; IC10.7@81.534,-62.016 81.534,-58.409 78.74,-55.615 ; RZ3.2@86.868,-27.178 86.233,-35.328 85.7,-35.861 ; IC8.7@90.932,-35.981 90.932,-37.465 90.424,-37.973 87.811,-37.973 85.7,-35.861 ; C33.1@83.978,-35.328 85.7,-35.861 ; C33.1@83.978,-35.328 85.166,-35.328 85.7,-35.861
  Bottom Layer w1: RZ1.2@47.498,-27.305 49.428,-29.235 66.603,-29.235 RZ2.2@68.199,-27.639 70.108,-25.73 85.42,-25.73 RZ3.2@86.868,-27.178 ; RZ4.2@59.309,-52.07 60.985,-53.746 77.365,-53.746 RZ5.2@78.74,-52.371 77.372,-51.003 v1(76.302,-51.003) ; JP2.2@60.579,-80.01 64.643,-80.01 65.786,-81.153 LC_EN/CAL1.1@67.564,-81.153
+3V3_LCAA: C18.1 C19.1 C23.1 C26.1 C29.1 IC1.5 IC2.5 IC3.5 IC4.5 IC5.5 LCAA_EN1.2 | length 224.5
  Top Layer w1: LCAA_EN1.2@91.533,-77.978 91.533,-62.703 91.584,-62.652 91.584,-48.725 94.077,-46.233 103.398,-46.233 106.578,-43.053 v1(106.578,-33.553) ; IC1.5@111.833,-29.022 113.132,-29.022 113.452,-28.702 v1(113.487,-28.702) C18.1@114.774,-28.702 115.494,-28.702 116.916,-30.124 v1(117.932,-30.124) ; IC2.5@139.011,-29.022 141.097,-29.022 141.707,-28.412 C19.1@141.707,-27.72 ; C19.1@141.698,-27.72 C19.1@141.707,-27.72 ; v1(143.476,-29.489) C19.1@141.707,-27.72 ; v1(164.313,-29.489) v1@164.414,-29.591 ; v1(164.897,-29.591) v1(164.897,-30.074) ; C23.1@165.701,-27.974 163.986,-28.848 IC3.5@162.526,-29.591 ; v1(190.983,-30.074) 190.983,-28.92 191.262,-28.641 IC4.5@192.224,-28.641 192.678,-28.641 194.488,-26.831 C26.1@195.673,-26.831 v1(197.028,-26.831) ; IC5.5@220.525,-27.305 221.071,-27.305 ; v1(221.579,-28.321) 221.579,-27.813 221.071,-27.305 ; C29.1@224.482,-26.003 222.79,-26.003 221.488,-27.305 221.071,-27.305 ; IC3.5@162.526,-29.591 164.222,-29.936 164.802,-30.054 v1(164.897,-30.074) ; IC3.5@162.526,-29.591 164.313,-29.591 v1@164.414,-29.591 ; v1@164.414,-29.591 v1(164.897,-30.074)
  Bottom Layer w1: v1(106.578,-33.553) 111.43,-28.702 v1(113.487,-28.702) ; v1(117.932,-30.124) 123.533,-24.524 131.127,-24.524 136.195,-29.591 v1@143.476,-29.591 ; v1(143.476,-29.489) v1@143.476,-29.591 ; v1@143.477,-29.591 v1(164.313,-29.489) ; v1(164.897,-30.074) v1(190.983,-30.074) ; v1(164.897,-29.591) v1@143.476,-29.591 ; v1(197.028,-26.831) 198.518,-28.321 v1(221.579,-28.321)
+3V3_PT: C42.1 C43.1 C44.1 C45.1 IC11.5 IC12.5 IC13.5 IC14.5 P1.2 R42.1 R43.1 R52.1 R53.1 | length 121
  Top Layer w1: P1.2@85.217,-77.978 86.233,-77.978 89.344,-81.089 105.537,-81.089 105.829,-80.797 105.829,-75.923 105.029,-75.123 IC14.5@104.247,-75.123 106.323,-75.023 C45.1@108.331,-75.023 ; IC11.5@104.267,-55.245 105.893,-55.245 106.308,-54.83 C42.1@107.603,-54.83 ; R42.1@107.603,-50.165 C42.1@107.603,-54.83 ; IC13.5@123.678,-74.742 124.333,-74.742 ; IC12.5@124.44,-55.565 125.882,-55.565 125.909,-55.592 C43.1@127.288,-55.592 ; R43.1@127.288,-50.546 C43.1@127.288,-55.592 ; C42.1@107.603,-54.83 C42.1@107.95,-54.83 109.093,-54.83 109.381,-55.118 R53.1@109.381,-70.358 109.381,-73.973 C45.1@108.331,-75.023 ; C45.1@108.331,-75.023 109.728,-75.023 115.477,-80.772 124.46,-80.772 124.892,-80.34 124.892,-75.301 124.333,-74.742 ; 124.333,-74.742 125.628,-74.742 125.655,-74.769 C44.1@127.635,-74.769 127.762,-74.769 R52.1@127.762,-69.469 127.762,-64.668 128.829,-63.602 128.829,-56.261 128.16,-55.592 C43.1@127.381,-55.592 C43.1@127.288,-55.592
+5V: 5V.A "Power H.2" C39.2 C40.2 C46.1 C47.1 C52.1 C53.1 IC15.5 IC16.5 IC17.5 IC18.5 VR2.2 VR3.3 | length 299
  Top Layer w1: 5V.A@26.712,-80.772 26.712,-68.614 37.304,-58.022 40.073,-58.022 41.758,-56.337 41.758,-53.492 VR2.2@41.783,-53.467 41.816,-53.434 41.816,-51.605 42.164,-51.257 42.164,-49.691 C39.2@42.13,-49.657 42.13,-49.607 40.591,-48.068 40.591,-46.924 ; VR3.3@28.128,-35.901 30.302,-35.901 30.502,-35.701 C40.2@32.7,-35.701 34.544,-35.701 39.853,-41.01 39.853,-46.186 40.591,-46.924 ; v1(42.601,-46.223) 41.9,-46.924 40.591,-46.924 ; v1(148.463,-54.331) 149.64,-55.508 149.64,-58.488 ; IC16.5@149.586,-73.057 149.64,-73.057 C47.1@149.64,-67.818 149.64,-58.496 ; C46.1@151.257,-45.974 151.257,-50.993 IC15.5@151.364,-50.993 152.425,-50.993 153.594,-52.161 153.594,-54.534 149.64,-58.488 ; IC18.5@172.807,-71.948 172.627,-69.416 172.627,-67.945 ; C52.1@173.643,-46.863 173.643,-48.133 ; 201.041,-77.343 201.041,-78.054 200.025,-79.07 183.752,-79.07 172.627,-67.945 ; 149.64,-58.496 149.64,-58.488 ; 149.64,-58.496 159.423,-48.713 173.063,-48.713 173.643,-48.133 ; 172.627,-67.945 C53.1@172.627,-67.056 172.627,-64.948 174.93,-62.645 174.93,-52.705 174.234,-52.009 IC17.5@173.716,-52.009 173.716,-49.479 173.643,-49.406 173.643,-48.133
  Bottom Layer w1: v1(42.601,-46.223) 104.356,-46.223 104.719,-45.86 106.463,-45.86 114.934,-54.331 v1(148.463,-54.331)
+10V: 10V.A "Power H.3" C37.2 C38.2 PT1.2 PT1.4 PT2.2 PT2.4 VR1.3 VR2.3 | length 309.6
  Top Layer w1: C37.2@20.828,-55.084 21.519,-55.084 21.519,-55.474 VR1.3@27.005,-60.96 ; 10V.A@35.518,-80.772 33.994,-82.296 25.984,-82.296 25.349,-81.661 25.349,-62.616 VR1.3@27.005,-60.96 ; v1(38.278,-42.621) 38.278,-46.406 39.243,-47.371 VR2.3@39.243,-53.467 39.243,-55.753 38.515,-56.481 C38.2@34.036,-56.481 31.484,-56.481 VR1.3@27.005,-60.96 ; v1(183.744,-68.834) 183.744,-18.517 PT2.4@184.261,-10.922
  Bottom Layer w1: v1(38.278,-42.621) 47.803,-33.096 86.588,-33.096 106.5,-13.184 157.203,-13.184 PT1.2@159.465,-10.922 PT1.4@166.465,-10.922 PT2.2@177.261,-10.922 PT2.4@184.261,-10.922 ; v1(183.744,-68.834) 195.072,-68.834 203.581,-77.343
+12: D1.2 D2.2 D3.2 D4.2 D5.2 D6.2 | length 72.2
  Top Layer w1: D1.2@15.24,-15.274 D2.2@24.536,-15.274 25.781,-15.274 26.797,-16.29 26.797,-20.091 27.305,-20.599 31.877,-20.599 32.639,-19.837 32.639,-15.528 32.893,-15.274 D3.2@33.833,-15.274 35.433,-15.274 37.186,-17.027 37.186,-19.685 37.719,-20.218 41.402,-20.218 41.935,-19.685 41.935,-15.621 42.282,-15.274 D4.2@43.129,-15.274 46.643,-15.274 47.498,-16.129 47.498,-19.533 48.133,-20.168 51.689,-20.168 52.426,-19.431 D5.2@52.426,-15.274 D6.2@61.722,-15.274
+12V: "Power H.4" D8.1 Power.1 Power.2 | length 221
  Top Layer w1: Power.2@11.303,-33.909 18.796,-41.402 D8.1@18.796,-44.323
  Bottom Layer w1: Power.1@6.303,-37.409 7.803,-37.409 Power.2@11.303,-33.909 ; D8.1@18.796,-44.323 23.797,-49.324 100.81,-49.324 115.24,-63.754 192.532,-63.754 206.121,-77.343
ADC1_A5: "ADC H.1" ADC1.6 | length 19.9
  Top Layer w0.254: 198.501,-64.643 197.46,-63.602 197.46,-47.079 197.993,-46.545 ADC1.6@199.169,-46.545
ADC1_A6: "ADC H.2" ADC1.7 | length 20.6
  Top Layer w0.254: ADC1.7@199.169,-45.276 200.025,-45.276 201.041,-46.291 201.041,-64.643
ADC1_A7: "ADC H.3" ADC1.8 | length 23
  Top Layer w0.254: ADC1.8@199.169,-44.005 200.025,-44.005 202.438,-46.419 202.438,-63.5 203.581,-64.643
ADC1_CS: *.22 ADC1.10 R1.1 | length 67.2
  Top Layer w0.254: R1.1@188.299,-44.729 188.845,-45.276 ADC1.10@193.769,-45.276 194.729,-45.276 v1(194.92,-45.085)
  Bottom Layer w0.254: v1(194.92,-45.085) 205.918,-34.087 *.22@250.596,-34.087
ADC2_A4: "ADC H.4" ADC2.5 ADC4.4 | length 66.1
  Top Layer w0.254: v1(217.983,-52.273) 217.983,-49.098 219.329,-47.752 ADC2.5@220.124,-47.752 221.519,-47.752 222.809,-46.462 222.809,-32.309 223.418,-31.699 225.716,-31.699 226.046,-31.369 226.046,-14.449 ADC4.4@222.519,-10.922
  Bottom Layer w0.254: 206.121,-64.643 217.983,-52.781 v1(217.983,-52.273)
ADC2_A5: "ADC H.5" ADC2.6 ADC4.3 | length 71.9
  Top Layer w0.254: v1(218.252,-53.655) 217.302,-52.705 217.302,-47.836 218.656,-46.482 ADC2.6@220.124,-46.482 221.132,-46.482 221.513,-46.101 221.513,-32.842 223.22,-31.136 225.39,-31.136 225.538,-30.988 225.538,-17.41 221.132,-13.005 221.132,-8.035 ADC4.3@219.019,-5.922
  Bottom Layer w0.254: 208.661,-64.643 208.661,-63.246 v1(218.252,-53.655)
ADC2_A6: "ADC H.6" ADC2.7 ADC4.2 | length 62.5
  Top Layer w0.254: ADC4.2@215.519,-10.922 219.136,-14.539 219.136,-30.252 219.278,-30.394 219.278,-37.744 218.821,-38.202 218.821,-44.704 219.329,-45.212 ; v1(217.678,-45.644) 218.11,-45.212 219.329,-45.212 ; ADC2.7@220.124,-45.212 219.329,-45.212
  Bottom Layer w0.254: 211.201,-64.643 220.061,-55.783 220.061,-48.027 v1(217.678,-45.644)
ADC2_A7: "ADC H.7" ADC2.8 ADC4.1 | length 68.4
  Top Layer w0.254: ADC4.1@212.019,-5.922 214.608,-5.922 219.644,-10.958 219.644,-29.83 219.888,-30.074 219.888,-36.779 220.116,-37.008 220.116,-43.942 ADC2.8@220.124,-43.942 220.675,-43.942 v1(220.675,-43.256)
  Bottom Layer w0.254: 213.741,-64.643 220.675,-57.709 v1(220.675,-43.256)
ADC2_CS: *.24 ADC2.10 R2.1 | length 53.2
  Top Layer w0.254: R2.1@208.314,-43.942 209.436,-45.064 213.914,-45.064 ADC2.10@214.105,-45.212 ; v1(213.284,-36.627) 213.284,-44.577 ADC2.10@214.105,-45.212 ; ADC2.10@214.724,-45.212 ADC2.10@214.105,-45.212
  Bottom Layer w0.254: v1(213.284,-36.627) *.24@250.596,-36.627
ADC3_A4: "ADC H.8" ADC3.5 ADC5.4 | length 74.2
  Top Layer w0.254: 216.281,-64.643 226.568,-54.356 239.293,-54.356 239.928,-53.721 239.928,-48.489 240.665,-47.752 ADC3.5@242.222,-47.752 242.672,-47.752 243.353,-47.071 243.353,-43.256 242.316,-42.219 242.189,-20.832 242.189,-19.034 242.712,-18.511 ADC5.4@242.712,-10.922
ADC3_A5: "ADC H.9" ADC3.6 ADC5.3 | length 75.5
  Top Layer w0.254: v1(238.557,-53.645) 238.557,-47.066 239.141,-46.482 239.624,-46.482 ; ADC5.3@239.212,-5.922 239.212,-46.07 239.624,-46.482 ; ADC3.6@242.222,-46.482 239.624,-46.482
  Bottom Layer w0.254: 218.821,-64.643 229.819,-53.645 v1(238.557,-53.645)